# Allegro board Netduino3_16Dec16_0800.brd
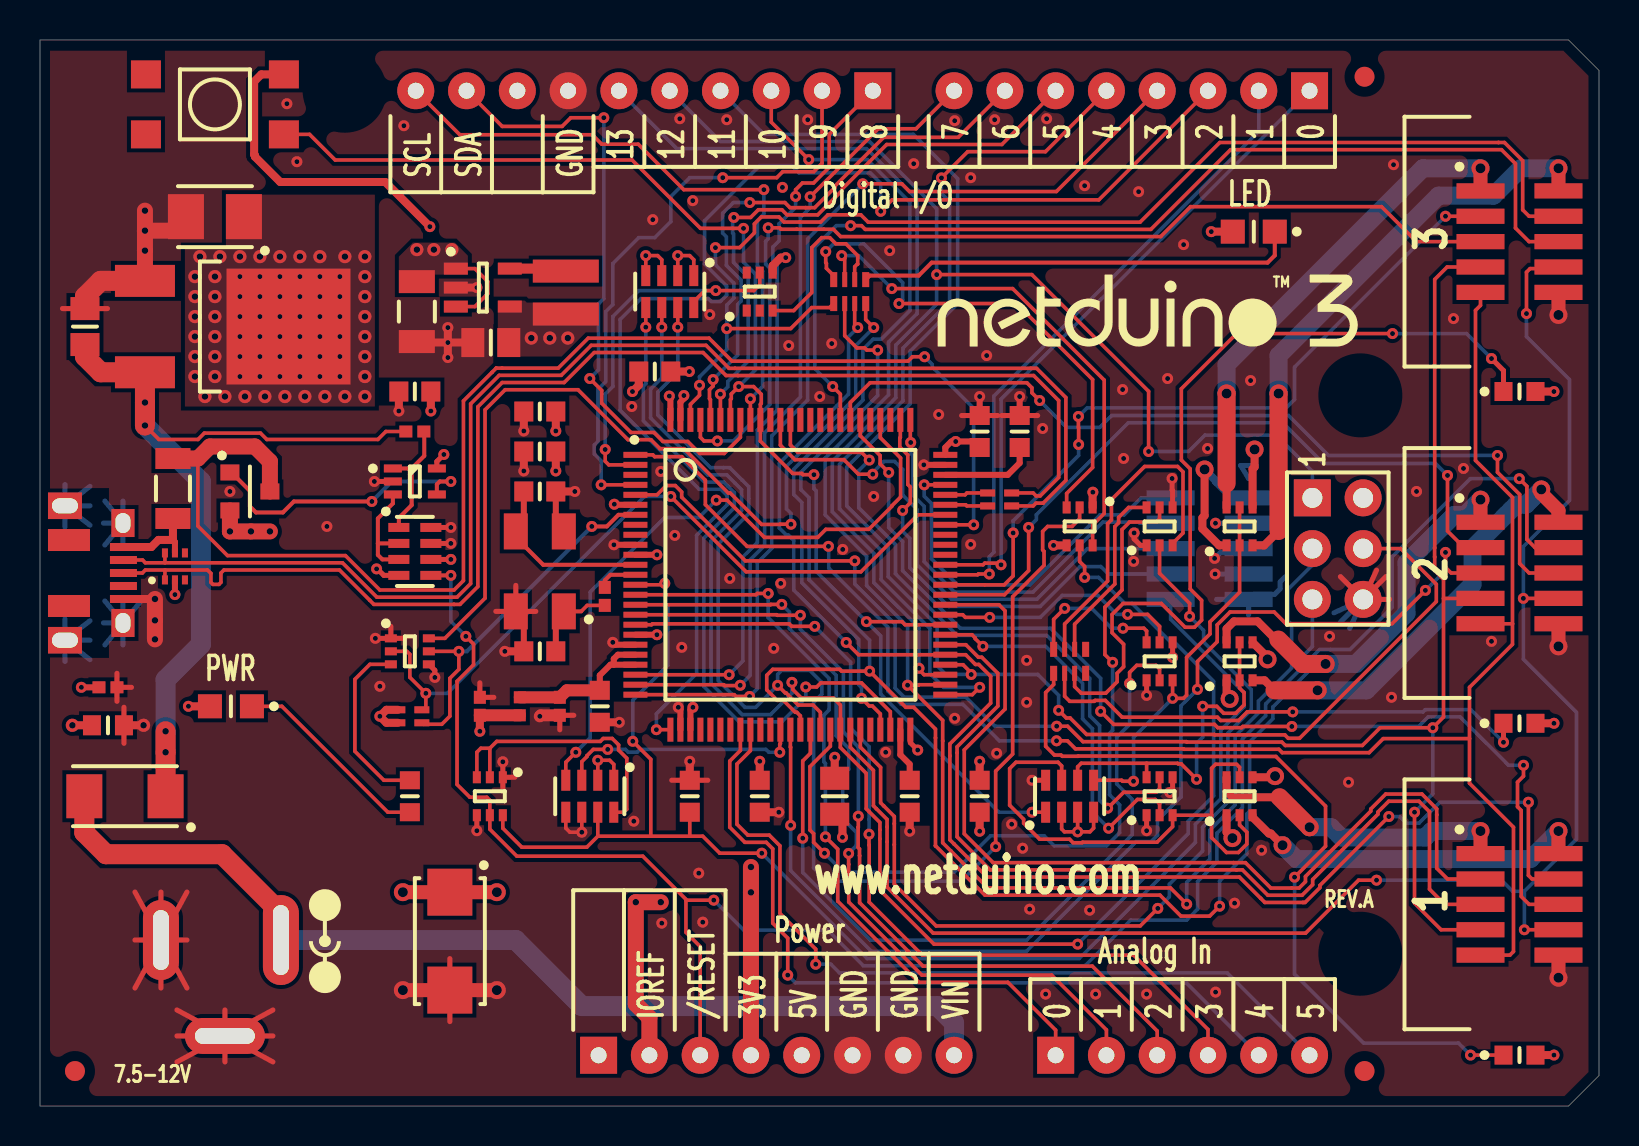
[diagram p0: board, top side]
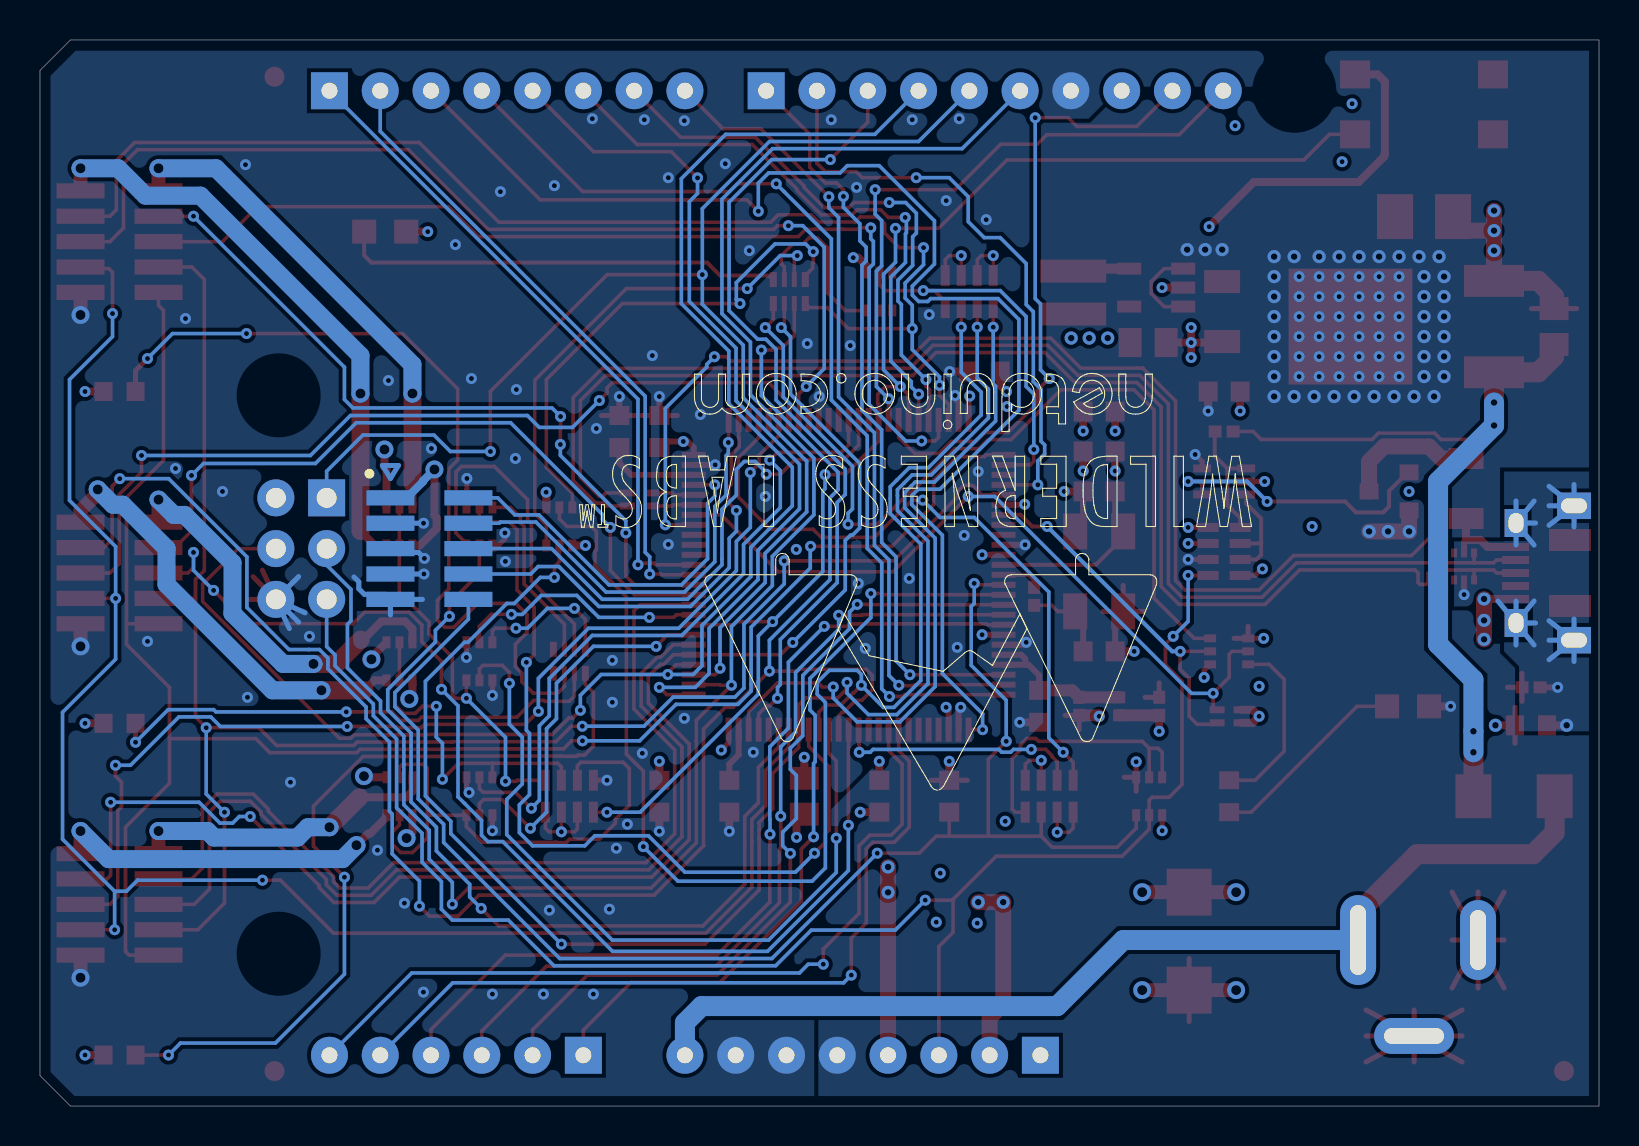
[diagram p1: board, bottom side, seen from below]

Outline 77.98 x 53.34 mm; copper layers: TOP, L2-GND, L3-PWR, BOTTOM. Coordinates in mm from the lower left corner of the outline.
Outline path: 0,0 0,53.34 76.45,53.34 77.98,51.82 77.98,1.52 76.45,0 0,0

## Placement (name value [footprint] x y rotation side)
C1  22uF  [CAPC3216X180N]  18.85 39.75 270 top
C2  10uF  [CAPC2012X125N]  2.25 39 90 top
C4  22uF  [CAPC2012X125N]  22.55 38.2 180 top
C5  0.1uF  [CAPC1608X90N]  28 20 270 top
C6  0.1uF  [CAPC1608X90N]  18.75 35.75 180 top
C10  0.1uF  [CAPC1608X90N]  25 32.75 180 top
C11  0.1uF  [CAPC1608X90N]  36 15.5 270 top
C12  0.1uF  [CAPC1608X90N]  47 15.5 270 top
C13  0.1uF  [CAPC1608X90N]  47 33.75 90 top
C14  0.1uF  [CAPC1608X90N]  30.75 36.75 0 top
C16  2.2uF  [CAPC1608X90N]  49 33.75 90 top
C17  2.2uF  [CAPC1608X90N]  43.5 15.5 270 top
C18  18pF  [CAPC1608X90N]  25 30.75 0 top
C19  18pF  [CAPC1608X90N]  25 22.75 180 top
C20  4.7nF  [CAPC1005X55N]  3.4 20.95 180 top
C21  100uF  [CAPMP6032X280N]  20.5 8.25 270 top
C42  22uF  [CAPC2012X125N]  39.75 15.5 270 top
C43  47uF  [F931A476MBA]  8.75 44.5 180 top
C44  1uF  [CAPC1005X55N]  26 20 270 top
C45  1uF  [CAPC1005X55N]  22 20 90 top
C46  0.1uF  [CAPC1608X90N]  25 34.75 180 top
C47  0.1uF  [CAPC1608X90N]  32.5 15.5 90 top
D1  WHITE  [LEDC2012X110N]  9.55 20 180 top
D2  BLUE  [LEDC2012X110N]  60.71 43.75 180 top
D3  SS15E-TP  [SS15-TP]  4.25 15.5 180 top
D4  -  [SP3003-04XTG]  6.75 27 90 top
D5  BLUE  [LEDC1608X80N]  74 2.55 0 top
D6  BLUE  [LEDC1608X80N]  74 19.15 0 top
D7  BLUE  [LEDC1608X80N]  74 35.75 0 top
F1  MF-NSMF075-2  [RESC3216X100N]  6.65 30.9 90 top
F2  -  [FID_1-00_X_2-00]  1.75 1.75 0 top
F3  -  [FID_1-00_X_2-00]  66.25 1.75 0 top
F4  -  [FID_1-00_X_2-00]  66.25 51.5 0 top
J1  ADC-043A-1  [ADC-002A-1]  -1.75 8.31 90 top
J2  HDR100IMP08F-G-V-TH-BLUE  [HDR100IMP08F-G-V-TH]  63.5 50.8 180 top
J3  HDR100IMP08F-G-V-TH-BLUE  [HDR100IMP10F-G-V-TH]  41.66 50.8 180 top
J4  HDR100IMP08F-G-V-TH-BLUE  [HDR100IMP06F-G-V-TH]  50.8 2.54 0 top
J5  -  [DX4R005JJ2R1800]  0 26.67 270 top
J6  HDR100IMP08F-G-V-TH-BLUE  [HDR100IMP08F-G-V-TH]  27.94 2.54 0 top
J7  -  [67996-206HLF]  63.64 30.43 270 top
J8  -  [MINI_JTAG_SMD]  58.5 27.89 180 bottom
J10  HDR050IDC10MS2-G-V-SM-BLUE  [20021521-00010T1LF]  74 10.09 0 top
J11  HDR050IDC10MS2-G-V-SM-BLUE  [20021521-00010T1LF]  74 26.67 0 top
J12  HDR050IDC10MS2-G-V-SM-BLUE  [20021521-00010T1LF]  74 43.25 0 top
L1  2.2uH  [LQH3NPN2R2NM0L]  26.3 40.7 270 top
L2  BEAD FERRITE/SM  [INDC1005X55N]  24 20 270 top
MT1  -  [MTG320H420NP_720KO]  15.24 50.8 0 top
MT2  -  [MTG320H420NP_720KO]  66.04 35.56 0 top
MT3  -  [MTG320H420NP_720KO]  66.04 7.62 0 top
NOREF  -  []  0 53.34 0 top
NOREF#2  -  []  44.9 38 0 top
NOREF#3  -  []  14.25 8.25 90 top
NOREF#4  -  []  0 0 90 top
Q1  -  [MUN5215DW1T1G]  18.5 22.75 0 top
Q2  -  [MUN5215DW1T1G]  22.5 15.5 270 top
Q3  -  [NTR4101PT1G]  10.5 30.75 0 top
Q4  -  [NTJD4152PT1G]  36 40.75 90 top
Q5  -  [NTJD4152PT1G]  60 15.5 90 top
Q6  -  [MUN5215DW1T1G]  56 15.5 90 top
Q7  -  [NTJD4152PT1G]  60 22.25 90 top
Q8  -  [NTJD4152PT1G]  52 29 270 top
Q9  -  [NTJD4152PT1G]  60 29 90 top
Q10  -  [MUN5215DW1T1G]  56 22.25 90 top
Q11  -  [MUN5215DW1T1G]  56 29 90 top
R1  1K  [RESCAV50P80X160X60-8N]  40.5 40.75 270 top
R3  1.5K  [RESC1608]  18.5 15.5 90 top
R4  10K  [RESCAV80P160X320X70-8N]  18.75 27.75 0 top
R5  10K  [RESCAV80P160X320X70-8N]  27.5 15.5 270 top
R6  15.4K  [CAPC1005X55N]  18.75 33.75 0 top
R7  390  [CAPC1005X55N]  28.25 25.5 90 top
R8  100K  [EXB24V]  18.5 19.5 0 top
R9  22  [EXB24V]  48 30.35 180 top
R10  1M  [RESC1608]  3.4 19.05 180 top
R12  10K  [RESCAV80P160X320X70-8N]  51.5 15.5 90 top
R14  10K  [RESCAV80P160X320X70-8N]  31.5 40.75 270 top
R15  680  [RESCAV50P80X160X60-8N]  51.5 22.25 90 top
SW1  -  [TSXH-2GL]  8.75 50.12 0 top
U1  LM3671MF-3.3/NOPB  [LM3671MF]  22.15 40.95 0 top
U2  -  [TLV1117-50IKVURG3]  5.25 39 0 top
U3  -  [LMV321IDCKR]  18.75 31.25 0 top
U4  STM32F427  [STM32F427VIT6]  37.53 26.58 0 top
Y1  25 Mhz  [ABM3B]  25 26.75 90 top

## Library data of the parts
C1 C2 C4-C6 C10-C14 C16-C21 C42-C47 = C
D1 = LED_2
D2 D5-D7 = LED_1
D3 = D05AZ75_0
D4 = HEADER 6_0
F1 = FUSE
F2-F4 MT1-MT3 = MOUNT_HOLE
J1 = HEADER 3
J2 J6 = HEADER 8
J3 = HEADER 10
J4 = HEADER 6
J5 = HEADER 11_0
J7 = HEADER 6_1
J8 J10-J12 = HEADER 10_2
L1 = L
L2 = BEAD FERRITE/SM
Q1 Q2 = MUN5215DW1T1G_3
Q3 = NDF0610/TO_1
Q4 Q5 Q7-Q9 = NTJD4152PT1G
Q6 Q10 Q11 = MUN5215DW1T1G_0
R1 R4 R5 R12 R14 R15 = RESCAV50P80X160X60-8N
R3 R6 R7 R10 = R
R8 R9 = EXB24V
SW1 = SW PUSHBUTTON-SPST-2_0
U1 = HEADER 5_0
U2 = LM7805/TO_2
U3 = LMV321/SO
U4 = STM32F427_0
Y1 = OSC_XF

## Footprints (pads in the part's own frame, mm; a bottom-side part is the same pattern mirrored in y, then rotated)
67996-206HLF
  rect 1.85x1.85 hole 1: 1(0,0)
  round 1.85 hole 1: 2(0,2.54) 3(2.54,0) 4(2.54,2.54) 5(5.08,0) 6(5.08,2.54)
20021521-00010T1LF
  rect 2.4x0.76 smd: 1(-1.95,2.54) 2(1.95,2.54) 3(-1.95,1.27) 4(1.95,1.27) 5(-1.95,0) 6(1.95,0) 7(-1.95,-1.27) 8(1.95,-1.27) 9(-1.95,-2.54) 10(1.95,-2.54)
ABM3B
  rect 1.8x1.2 smd: 1(-2,-1.2) 2(2,-1.2) 3(2,1.2) 4(-2,1.2)
ADC-002A-1
  oval 4.5x1.8 hole 3.5x0.8: 1(0,-13.8)
  oval 1.8x4 hole 0.8x3: 2(-4.8,-11)
  oval 4x1.8 hole 3x0.8: 3(0,-7.8)
CAPC1005X55N
  rect 0.65x0.6 smd: 1(-0.45,0) 2(0.45,0)
CAPC1608X90N
  rect 0.95x1 smd: 1(-0.8,0) 2(0.8,0)
CAPC2012X125N
  rect 1.15x1.45 smd: 1(-0.9,0) 2(0.9,0)
CAPC3216X180N
  rect 1.15x1.8 smd: 1(-1.5,0) 2(1.5,0)
CAPMP6032X280N
  rect 2.35x2.25 smd: 1(-2.45,0) 2(2.45,0)
DX4R005JJ2R1800
  rect 0.4x1.35 smd: 1(-1.3,4.175) 2(-0.65,4.175) 3(0,4.175) 4(0.65,4.175) 5(1.3,4.175)
  rect 1.4x1.15 hole 1x0.75: 6(-2.5,4.15) 7(2.5,4.15)
  rect 1.325x1.7 hole 0.75x1.3: 8(-3.362,1.25) 11(3.362,1.25)
  rect 1.1x2.1 smd: 9(-1.65,1.45) 10(1.65,1.45)
EXB24V
  rect 0.75x0.35 smd: 1(-0.6,0.325) 2(-0.6,-0.325) 3(0.6,-0.325) 4(0.6,0.325)
F931A476MBA
  rect 1.8x2.25 smd: 1(-1.45,0) 2(1.45,0)
FID_1-00_X_2-00
  round 1 smd: 1(0,0)
HDR100IMP06F-G-V-TH
  rect 1.85x1.85 hole 0.8: 1(0,0)
  round 1.85 hole 0.8: 2(2.54,0) 3(5.08,0) 4(7.62,0) 5(10.16,0) 6(12.7,0)
HDR100IMP08F-G-V-TH
  rect 1.85x1.85 hole 0.8: 1(0,0)
  round 1.85 hole 0.8: 2(2.54,0) 3(5.08,0) 4(7.62,0) 5(10.16,0) 6(12.7,0) 7(15.24,0) 8(17.78,0)
HDR100IMP10F-G-V-TH
  rect 1.85x1.85 hole 0.8: 1(0,0)
  round 1.85 hole 0.8: 2(2.54,0) 3(5.08,0) 4(7.62,0) 5(10.16,0) 6(12.7,0) 7(15.24,0) 8(17.78,0) 9(20.32,0) 10(22.86,0)
INDC1005X55N
  rect 0.6x0.6 smd: 1(-0.45,0) 2(0.45,0)
LEDC1608X80N
  rect 0.899x0.95 smd: A(0.8,0) C(-0.8,0)
LEDC2012X110N
  rect 1.2x1.2 smd: A(1.05,0) C(-1.05,0)
LM3671MF
  rect 1.2x0.6 smd: 1(-1.35,0.95) 2(-1.35,0) 3(-1.35,-0.95) 4(1.35,-0.95) 5(1.35,0.95)
LMV321IDCKR
  rect 0.9x0.4 smd: 1(-1.1,0.65) 2(-1.1,0) 3(-1.1,-0.65) 4(1.1,-0.65) 5(1.1,0.65)
LQH3NPN2R2NM0L
  rect 1.15x3.3 smd: 1(-1.075,0) 2(1.075,0)
MINI_JTAG_SMD
  rect 2.4x0.76 smd: 1(-1.95,2.54) 2(1.95,2.54) 3(-1.95,1.27) 4(1.95,1.27) 5(-1.95,0) 6(1.95,0) 7(-1.95,-1.27) 8(1.95,-1.27) 9(-1.95,-2.54) 10(1.95,-2.54)
MTG320H420NP_720KO
  round 0 hole 3.2 unplated: (0,0)
MUN5215DW1T1G
  rect 0.6x0.4 smd: 1(-0.95,0.65) 2(-0.95,0) 3(-0.95,-0.65) 4(0.95,-0.65) 5(0.95,0) 6(0.95,0.65)
NTJD4152PT1G
  rect 0.6x0.4 smd: 1(-0.95,0.65) 2(-0.95,0) 3(-0.95,-0.65) 4(0.95,-0.65) 5(0.95,0) 6(0.95,0.65)
NTR4101PT1G
  rect 0.95x0.8 smd: 1(-1,0.95) 2(-1,-0.95) 3(1,0)
RESC1608
  rect 0.899x1.001 smd: 1(-0.8,0) 2(0.8,0)
RESC3216X100N
  rect 1.05x1.75 smd: 1(-1.5,0) 2(1.5,0)
RESCAV50P80X160X60-8N
  rect 0.75x0.35 smd: 1(-0.6,0.8) 4(-0.6,-0.8) 5(0.6,-0.8) 8(0.6,0.8)
  rect 0.75x0.25 smd: 2(-0.6,0.25) 3(-0.6,-0.25) 6(0.6,-0.25) 7(0.6,0.25)
RESCAV80P160X320X70-8N
  rect 1.05x0.45 smd: 1(-0.8,1.2) 2(-0.8,0.4) 3(-0.8,-0.4) 4(-0.8,-1.2) 5(0.8,-1.2) 6(0.8,-0.4) 7(0.8,0.4) 8(0.8,1.2)
SP3003-04XTG
  rect 0.45x0.3 smd: 1(-0.675,0.5) 2(-0.675,0) 3(-0.675,-0.5) 4(0.675,-0.5) 5(0.675,0) 6(0.675,0.5)
SS15-TP
  rect 1.8x2.2 smd: A(2.032,0) C(-2.032,0)
STM32F427VIT6
  rect 1.2x0.3 smd: 1(-7.75,6) 2(-7.75,5.5) 3(-7.75,5) 4(-7.75,4.5) 5(-7.75,4) 6(-7.75,3.5) 7(-7.75,3) 8(-7.75,2.5) 9(-7.75,2) 10(-7.75,1.5) 11(-7.75,1) 12(-7.75,0.5) 13(-7.75,0) 14(-7.75,-0.5) 15(-7.75,-1) 16(-7.75,-1.5) 17(-7.75,-2) 18(-7.75,-2.5) 19(-7.75,-3) 20(-7.75,-3.5) 21(-7.75,-4) 22(-7.75,-4.5) 23(-7.75,-5) 24(-7.75,-5.5) 25(-7.75,-6) 51(7.75,-6) 52(7.75,-5.5) 53(7.75,-5) 54(7.75,-4.5) 55(7.75,-4) 56(7.75,-3.5) 57(7.75,-3) 58(7.75,-2.5) 59(7.75,-2) 60(7.75,-1.5) 61(7.75,-1) 62(7.75,-0.5) 63(7.75,0) 64(7.75,0.5) 65(7.75,1) 66(7.75,1.5) 67(7.75,2) 68(7.75,2.5) 69(7.75,3) 70(7.75,3.5) 71(7.75,4) 72(7.75,4.5) 73(7.75,5) 74(7.75,5.5) 75(7.75,6)
  rect 0.3x1.2 smd: 26(-6,-7.75) 27(-5.5,-7.75) 28(-5,-7.75) 29(-4.5,-7.75) 30(-4,-7.75) 31(-3.5,-7.75) 32(-3,-7.75) 33(-2.5,-7.75) 34(-2,-7.75) 35(-1.5,-7.75) 36(-1,-7.75) 37(-0.5,-7.75) 38(0,-7.75) 39(0.5,-7.75) 40(1,-7.75) 41(1.5,-7.75) 42(2,-7.75) 43(2.5,-7.75) 44(3,-7.75) 45(3.5,-7.75) 46(4,-7.75) 47(4.5,-7.75) 48(5,-7.75) 49(5.5,-7.75) 50(6,-7.75) 76(6,7.75) 77(5.5,7.75) 78(5,7.75) 79(4.5,7.75) 80(4,7.75) 81(3.5,7.75) 82(3,7.75) 83(2.5,7.75) 84(2,7.75) 85(1.5,7.75) 86(1,7.75) 87(0.5,7.75) 88(0,7.75) 89(-0.5,7.75) 90(-1,7.75) 91(-1.5,7.75) 92(-2,7.75) 93(-2.5,7.75) 94(-3,7.75) 95(-3.5,7.75) 96(-4,7.75) 97(-4.5,7.75) 98(-5,7.75) 99(-5.5,7.75) 100(-6,7.75)
TLV1117-50IKVURG3
  rect 3x1.6 smd: 1(0,2.286) 3(0,-2.286)
  rect 6.2x5.8 smd: 4(7.18,0)
TSXH-2GL
  rect 1.5x1.4 smd: 1(-3.45,1.5) 2(3.45,1.5) 3(-3.45,-1.5) 4(3.45,-1.5)

## Nets
3V3_GOPORT1: J10.1(3V3) Q5.6(DRAIN)
3V3_GOPORT2: J11.1(3V3) Q7.6(DRAIN)
3V3_GOPORT3: J12.1(3V3) Q9.6(DRAIN)
5V_GOPORT1: J10.2(5V) Q5.3(DRAIN)
5V_GOPORT2: J11.2(5V) Q7.3(DRAIN)
5V_GOPORT3: J12.2(5V) Q9.3(DRAIN)
+3.3V: C4.1 C10.1 C11.1 C12.1 C13.1 C14.1 C21.1 C42.1 C45.1 C46.1 J6.2 J6.4 J8.1(VCC) L1.2 L2.2 Q4.4(SOURCE) Q5.1(SOURCE) Q7.1(SOURCE) Q8.1(SOURCE) Q8.4(SOURCE) Q9.1(SOURCE) R4.4(1) R5.1 R5.2(1) R8.1 R8.2(1) R14.1 R14.2(1) R14.3(1) R14.4(1) SW1.2 U1.4(FB) U4.6(VBAT) U4.11(VDD1) U4.19(VDD2) U4.28(VDD3) U4.50(VDD4) U4.75(VDD5) U4.100(VDD6)
+5.0V: C1.1 C6.1 C43.1 D1.A(ANODE) D2.A(ANODE) D5.A(ANODE) D6.A(ANODE) D7.A(ANODE) J6.5 J7.2(VTG) Q3.2(SOURCE) Q5.4(SOURCE) Q7.4(SOURCE) Q9.4(SOURCE) R4.6(2) R12.2(1) R12.3(1) R12.4(1) U1.1(VIN) U1.3(EN) U2.4(VOUT) U3.5(+VCC)
+VIN: D3.A(1) J1.1 J6.8
+VIN_PROTECTED: C2.1 D3.C(2) R6.1 U2.3(VIN)
GND: C1.2 C2.2 C4.2 C5.2 C6.2 C10.2 C11.2 C12.2 C13.2 C14.2 C16.2 C17.2 C18.2 C19.2 C20.1 C21.2 C42.2 C43.2 C44.2 C45.2 C46.2 C47.2 J1.2 J1.3 J3.7 J5.5(GND) J6.6 J6.7 J7.6(GND) J8.3(GND1) J8.5(GND2) J8.7(GND3) J8.9(GND4) J10.10(GND) J11.10(GND) J12.10(GND) Q1.1(E) Q1.4(E) Q2.1(E) Q2.4(E) Q6.1(E) Q6.4(E) Q10.1(E) Q10.4(E) Q11.1(E) Q11.4(E) R4.7(2) R4.8(2) R5.5(2) R5.6(2) R10.1 R12.8(2) U1.2(GND) U2.1(GND) U3.2(-VCC) U4.10(VSS1) U4.20(VSSA) U4.27(VSS2) U4.74(VSS3) U4.99(VSS4) Y1.2 Y1.4
VIN_COMP_LOGIC: Q3.1(GATE) U3.4(OUT)
VIN_REF: R4.2(1) R4.3(1) U3.3(-VIN)
/ENABLE_UART_TX_PULLUP_GOPORT1: Q4.5(GATE) R14.8(2) U4.2(PE3)
/ENABLE_UART_TX_PULLUP_GOPORT2: Q8.2(GATE) R14.7(2) U4.41(PE10)
/ENABLE_UART_TX_PULLUP_GOPORT3: Q8.5(GATE) R14.6(2) U4.43(PE12)
/EXTERNAL_RESET: J6.3 J7.5(R\E\S\E\T\) Q2.5(B) R4.5(2)
/INT_GOPORT1: J10.3(GIPO) U4.60(PD13)
/INT_GOPORT2: J11.3(GIPO) U4.61(PD14)
/INT_GOPORT3: J12.3(GIPO) U4.62(PD15)
/PWR_CTRL_GOPORT1: Q5.2(GATE) Q5.5(GATE) Q6.3(C) R12.7(2)
/PWR_CTRL_GOPORT2: Q6.6(C) Q7.2(GATE) Q7.5(GATE) R12.6(2)
/PWR_CTRL_GOPORT3: Q9.2(GATE) Q9.5(GATE) Q10.3(C) R12.5(2)
/RESET_MCU: C47.1 J8.10(NRST) Q2.6(C) R5.7(2) U4.14(NRST)
/SPI_CS_GOPORT1: J10.6(SPI_CS) U4.81(PD0)
/SPI_CS_GOPORT2: J11.6(SPI_CS) U4.82(PD1)
/SPI_CS_GOPORT3: J12.6(SPI_CS) U4.83(PD2)
A0: J4.1 U4.15(PC0)
A1: J4.2 U4.16(PC1)
A2: J4.3 U4.17(PC2)
A3: J4.4 U4.18(PC3)
A4: J4.5 U4.33(PC4)
A5: J4.6 U4.34(PC5)
CHASSIS_USB: C20.2 D4.2(GND) J5.6(CHS1) J5.7(CHS2) J5.8(CHS3) J5.11(CHS4) R10.2
D0: J2.1 U4.64(PC7)
D1: J2.2 U4.63(PC6)
D2: J2.3 U4.26(PA3)
D3: J2.4 U4.25(PA2)
D4: J2.5 U4.51(PB12)
D5: J2.6 U4.95(PB8)
D6: J2.7 U4.96(PB9)
D7: J2.8 U4.24(PA1)
D8: J3.1 U4.23(PA0)
D9: J3.2 U4.4(PE5)
D10: J3.3 U4.47(PB10)
D11: J3.4 J7.4(MOSI) U4.54(PB15)
D12: J3.5 J7.1(MISO) U4.53(PB14)
D13: J3.6 J7.3(SCK) U4.52(PB13)
JTCK: J8.4(JTCK) U4.76(PA14)
JTDI: J8.8(JTDI) U4.77(PA15)
JTDO: J8.6(JTDO) U4.89(PB3)
JTMS: J8.2(JTMS) U4.72(PA13)
LED: Q1.2(B) R8.4(2) U4.69(PA10)
LED_GOPORT1: Q10.2(B) U4.40(PE9)
LED_GOPORT2: Q11.5(B) U4.42(PE11)
LED_GOPORT3: Q11.2(B) U4.45(PE14)
OSC_IN: C18.1 U4.12(PH0) Y1.3
OSC_OUT: R7.2 U4.13(PH1)
OTG_FS_DM: R9.4(2) U4.70(PA11)
OTG_FS_DP: R9.3(2) U4.71(PA12)
PWR_LED: Q1.5(B) R8.3(2) U4.7(PC13)
PWR_ON_GOPORT1: Q6.5(B) U4.88(PD7)
PWR_ON_GOPORT2: Q6.2(B) U4.57(PD10)
PWR_ON_GOPORT3: Q10.5(B) U4.59(PD12)
SCL: J3.10 U4.92(PB6)
SDA: J3.9 U4.93(PB7)
SPI3_MISO: R5.4(1) U4.79(PC11)
SPI4_MISO: J10.8(SPI_MISO) J11.8(SPI_MISO) J12.8(SPI_MISO) U4.44(PE13)
SPI4_MOSI: J10.7(SPI_MOSI) J11.7(SPI_MOSI) J12.7(SPI_MOSI) U4.5(PE6)
SPI4_SCK: J10.9(SPI_SCK) J11.9(SPI_SCK) J12.9(SPI_SCK) U4.1(PE2)
SWITCH1: R12.1 SW1.4 U4.58(PD11) U4.91(PB5) U4.94(BOOT0)
USART3_RX_GOPORT1: J10.5(USART_RX) U4.56(PD9)
USART3_TX_GOPORT1: J10.4(USART_TX) R1.7(2) U4.55(PD8)
USART7_RX_GOPORT2: J11.5(USART_RX) U4.38(PE7)
USART7_TX_GOPORT2: J11.4(USART_TX) R1.6(2) U4.39(PE8)
USART8_RX_GOPORT3: J12.5(USART_RX) U4.97(PE0)
USART8_TX_GOPORT3: J12.4(USART_TX) R1.5(2) U4.98(PE1)
USB5V: D4.5(VCC) F1.1 J5.1(VBUS)
USB5V_F: F1.2 Q3.3(DRAIN) U4.68(PA9)
USB_D+: D4.1(I/O1) J5.3(D+) R9.2(1)
USB_D-: D4.6(I/O4) J5.2(D-) R9.1
VCAP_1: C17.1 U4.49(VCAP_1)
VCAP_2: C16.1 U4.73(VCAP_2)
N62667: R4.1 R6.2 U3.1(+VIN)
N62753: Q2.2(B) Q2.3(C) R5.8(2)
N62779: L1.1 U1.5(SW)
N62801: D2.C(CATHODE) R1.1
N62841: R5.3(1) U4.37(PB2)
N63081: C5.1 C44.1 L2.1 U4.21(VREF+) U4.22(VDDA)
N74908: Q1.6(C) R1.8(2)
N77511: D1.C(CATHODE) R3.1
N77515: Q1.3(C) R3.2
N197515: Q10.6(C) R15.8(2)
N197535: D5.C(CATHODE) R15.1
N197921: Q11.3(C) R15.7(2)
N197949: D6.C(CATHODE) R15.2(1)
N198166: Q11.6(C) R15.6(2)
N198194: D7.C(CATHODE) R15.3(1)
N199051: Q4.3(DRAIN) R1.2(1)
N202411: Q8.6(DRAIN) R1.3(1)
N203046: Q8.3(DRAIN) R1.4(1)
N249435: R14.5(2) U4.48(PB11)
N261857: C19.1 R7.1 Y1.1

Pads without a net: D4 3 4; F2 1; F3 1; F4 1; J3 8; J5 4 9 10; J6 1; Q4 1 2 6; R15 4 5; SW1 1 3; U4 3 8 9 29 30 31 32 35 36 46 65 66 67 78 80 84 85 86 87 90

## Via types
v1: diameter 0.55, hole 0.25, TOP to BOTTOM, 333 vias
v2: diameter 0.9, hole 0.5, TOP to BOTTOM, 25 vias
v3: diameter 0.66, hole 0.33, TOP to BOTTOM, 61 vias

## Routing (per net, layer and track width the routed paths; a pad name or vN(x,y) marks a point on that pad's centre or on a via; arc(x,y) is an arc through that point)
3V3_GOPORT1: length 15.6
  TOP w0.4: Q5.6 59.35,15.75 59.65,15.45 62,15.45
  TOP w0.7: J10.1 v2(72.05,13.76)
  TOP w0.9: 62,15.45 v2(63.5,13.95)
  BOTTOM w0.9: v2(63.5,13.95) 64.58,13.95 65.09,13.44 69.27,13.44 69.6,13.76 v2(72.05,13.76)
3V3_GOPORT2: length 20.4
  TOP w0.4: Q7.6 59.35,23.88 59.72,24.25 60.9,24.25 61.81,23.34 61.94,23.34
  TOP w0.7: J11.1 v2(72.05,30.34)
  TOP w0.9: v2(64.3,22.12) 63.16,22.12 61.94,23.34
  BOTTOM w0.9: v2(72.05,30.34) 71.29,29.58 70.74,29.58 68.35,27.18 68.35,24.65 65.82,22.12 v2(64.3,22.12)
3V3_GOPORT3: length 25
  TOP w0.4: 59.35,31.15 Q9.6
  TOP w0.7: J12.1 v2(72.05,46.92)
  TOP w0.9: v2(59.35,35.65) 59.35,31.15
  BOTTOM w0.9: v2(72.05,46.92) 69.17,46.92 59.35,37.1 v2(59.35,35.65)
5V_GOPORT1: length 18
  TOP w0.4: Q5.3 60.65,14.45 61.46,13.64 61.56,13.64 v2(62.15,13.05)
  TOP w0.7: J10.2 v2(75.95,13.76)
  BOTTOM w0.9: v2(62.15,13.05) 62.84,12.36 74.55,12.36 v2(75.95,13.76)
5V_GOPORT2: length 21.9
  TOP w0.4: 61.75,20.8 61.25,21.3 Q7.3
  TOP w0.7: v2(75.09,30.85) 75.09,30.66 75.95,29.8 J11.2
  TOP w0.9: 61.75,20.8 v2(63.9,20.8)
  BOTTOM w0.9: v2(63.9,20.8) 66.35,20.8 71.65,26.1 71.65,27.9 73.84,30.09 74.33,30.09 v2(75.09,30.85)
5V_GOPORT3: length 29.4
  TOP w0.4: 61.95,28.77 61.23,28.05 Q9.3
  TOP w0.7: J12.2 v2(75.95,46.92)
  TOP w0.9: v2(61.95,35.65) 61.95,28.77
  BOTTOM w0.9: v2(75.95,46.92) 74.07,46.92 72.7,45.55 69.95,45.55 61.95,37.55 v2(61.95,35.65)
+3.3V: length 80.4
  TOP w0.18: R14.1 32.7,42.34 32.49,42.55 v1(31.9,42.55) R14.2 ; R14.3 31.1,42.34 30.89,42.55 v1(30.3,42.55) R14.4 ; R5.1 28.7,17.09 28.5,17.3 v1(27.9,17.3) R5.2
  TOP w0.25: v1(43.9,17.81) 43.53,18.18 U4.50 ; v1(16.84,26.88) 16.87,26.88 17.2,26.55 R4.4
  TOP w0.3: U4.75 45.28,32.95 45.58,33.25 v1(45.8,33.25) 46.7,33.25 C13.1 ; U4.28 32.53,19.82 v1(32.66,19.95) ; U4.100 31.53,35.47 v1(31.48,35.52) ; U4.19 v1(30.86,23.58) ; U4.11 v1(30.86,27.58) ; v1(28.73,30.11) 28.76,30.08 U4.6
  TOP w0.4: v1(37.3,42.45) 37.05,42.45 36.65,42.05 Q4.4 ; v2(58.25,31.85) 58.25,29.54 58.14,29.43 58.14,28.89 58.98,28.05 Q9.1 ; R8.2 17.32,19.18 v1(17,19.5) 17.32,19.82 R8.1 ; Q8.4 v1(50.7,28.05) ; SW1.2 11.07,51.62 10.71,51.26 10.71,47.61 10.75,47.57 10.75,47.5 12.02,46.23 17.27,46.23 v1(19.5,44) ; v2(59.5,20.37) 59.35,20.52 Q7.1 ; C11.1 v1(36,17.25) ; v1(29.64,35.75) 29.95,36.06 C14.1 ; v1(52.66,30.71) 52.65,30.7 Q8.1 ; C10.1 v1(25.8,31.77) ; v2(59.64,13.41) 59.35,13.7 Q5.1 ; C45.1 v1(22,18.75) ; C42.1 v1(39.75,17.45) ; C12.1 v1(47,17.25) ; C46.1 v1(25.8,33.77)
  TOP w0.6: L2.2 C45.1
  TOP w0.7: v2(18.15,10.7) C21.1 v2(22.85,10.7)
  TOP w0.8: J6.2 30.48,4.42 29.8,5.1 v3(29.8,10.2) v3(31.05,10.2) ; J6.4 v3(35.56,10.69) v3(35.56,11.96)
  BOTTOM w0.4: v2(58.25,31.85) 58.82,31.28 58.82,31.24 59.63,30.43 J8.1
  vias: v3(24.57,38.42) v3(25.5,38.42) v3(26.4,38.42)
+5.0V: length 33.8
  TOP w0.18: U1.1 21.75,41.9 22.4,41.25 22.4,40.65 21.75,40 U1.3 ; R12.3 v1(51.9,13.72) ; v1(51.9,13.72) 51.24,13.72 51.1,13.86 R12.2 ; v1(51.9,13.72) 52.52,13.72 52.7,13.9 R12.4
  TOP w0.25: v1(20.2,32.6) 19.85,32.25 U3.5 ; R4.6 v1(20.55,27.35)
  TOP w0.4: D5.A v1(75.72,2.55) ; v2(61.4,22.35) 61.4,22.45 Q7.4 ; Q5.4 61.72,16.45 v2(61.77,16.51) ; C6.1 v1(19.55,34.77) ; v2(60.75,32.85) 60.75,31.97 60.65,31.87 Q9.4 ; D7.A v1(75.72,35.75) ; D1.A v1(7.42,20) ; D6.A v1(75.72,19.15) ; D2.A v1(58.59,43.75)
  TOP w0.8: v3(11.5,28.75) v3(10.55,28.75) v3(9.5,28.75) Q3.2
  L3-PWR w0.254: J7.2 66.18,31.75 ; J7.2 67.5,30.43 ; J7.2 65.04,29.29 ; J7.2 65.04,31.57 ; J7.2 67.32,29.29 ; J7.2 67.32,31.57
  vias: v1(10,41.5) v1(10,40.5) v1(10,39.5) v1(10,38.5) v1(10,37.5) v1(10,36.5) v1(11,41.5) v1(11,40.5) v1(11,39.5) v1(11,38.5) v1(11,37.5) v1(11,36.5) v1(12,41.5) v1(12,40.5) v1(12,39.5) v1(12,38.5) v1(12,37.5) v1(12,36.5) v1(13,41.5) v1(13,40.5) v1(13,39.5) v1(13,38.5) v1(13,37.5) v1(13,36.5) v1(14,41.5) v1(14,40.5) v1(14,39.5) v1(14,38.5) v1(14,37.5) v1(14,36.5) v1(15,41.5) v1(15,40.5) v1(15,39.5) v1(15,38.5) v1(15,37.5) v1(15,36.5) v3(7.75,41.5) v3(7.75,40.5) v3(7.75,39.5) v3(7.75,38.5) v3(7.75,37.5) v3(7.75,36.5) v3(8,42.5) v3(8.25,35.5) v3(8.75,41.5) v3(8.75,40.5) v3(8.75,39.5) v3(8.75,38.5) v3(8.75,37.5) v3(8.75,36.5) v3(9,42.5) v3(9.25,35.5) v3(10,42.5) v3(10.25,35.5) v3(11,42.5) v3(11.25,35.5) v3(12,42.5) v3(12.25,35.5) v3(13,42.5) v3(13.25,35.5) v3(14,42.5) v3(14.25,35.5) v3(15.25,42.5) v3(15.25,35.5) v3(16.25,42.5) v3(16.25,41.5) v3(16.25,40.5) v3(16.25,39.5) v3(16.25,38.5) v3(16.25,37.5) v3(16.25,36.5) v3(16.25,35.5) v3(18.85,42.85) v3(19.7,42.85) v3(20.6,42.85)
+VIN: length 51.7
  TOP w1: D3.A 2.22,13.68 3.3,12.6 9.11,12.6 12.05,9.66 J1.1
  BOTTOM w1: J6.8 45.72,4.17 44.88,5 27.1,5 23.79,8.31 J1.1
+VIN_PROTECTED: length 43
  TOP w0.18: R6.1 17.3,33.75 16.9,33.35 11.35,33.35 11.03,33.67 8.22,33.67 7.9,33.35 5.95,33.35 v3(5.25,34.05)
  TOP w1: D3.C v3(6.28,17.7) v3(6.28,18.75) ; v3(5.25,34.05) v3(5.25,35.2) U2.3 3.04,36.71 2.25,37.5 C2.1
  BOTTOM w1: v3(6.28,17.7) v3(6.28,18.75) 6.28,21.33 8.05,23.1 8.05,31.25 v3(5.25,34.05) v3(5.25,35.2)
GND: length 196.2
  TOP w0.18: R5.6 v1(27.1,13.7) 26.5,13.7 26.3,13.9 R5.5
  TOP w0.25: Q10.4 v1(56.65,22.45) ; R12.8 v1(49.62,16.3) ; R4.8 v1(20.55,28.95) ; Q11.1 55.05,28.05 54.73,28.38 v1(54.73,28.68) ; Q6.4 56.65,15.82 v1(56.52,15.69) ; Q10.1 v1(55.35,20.55) ; Q6.1 v1(55.35,13.78) ; Q11.4 56.65,30.79 56.62,30.82 v1(56.62,31.4) ; Q2.1 v1(23.15,17.23) ; Q1.1 v1(16.77,23.4) ; Q1.4 19.75,21.8 v1(19.75,21.45) ; U3.2 v1(16.73,31.25) ; R4.7 v1(20.55,28.15) ; Q2.4 v1(21.85,13.78)
  TOP w0.254: 22.8,24.75 Y1.4 ; Y1.4 24.8,24.75 ; Y1.4 23.8,26.05 ; 18.25,23.4 Q1.1 17.55,24 ; 26.7,19.55 C44.2 26,18.83 ; 4.75,5.91 J1.3 ; J1.3 6.05,10.71 ; J1.3 7.35,8.31 ; J1.3 7.35,10.71 ; J1.3 6.05,5.91 ; J1.3 7.35,5.91 ; J1.3 4.75,10.71 ; J1.3 4.75,8.31 ; 23.75,16.45 Q2.1 23.15,15.75 ; 3.85,20.25 C20.1 ; C20.1 3.85,21.65 ; C20.1 4.57,20.95 ; 20.5,7.37 C21.2 20.5,4.23 ; 4.2,18.15 R10.1 4.2,19.95 ; 6.85,3.51 J1.2 ; J1.2 11.65,3.51 ; J1.2 11.65,2.21 ; J1.2 6.85,4.81 ; J1.2 11.65,4.81 ; J1.2 9.25,2.21 ; J1.2 9.25,4.81 ; J1.2 6.85,2.21 ; J7.6 67.32,26.49 ; J7.6 67.5,25.35 ; J7.6 65.04,26.49 ; J7.6 66.85,26.81 ; 49.9,34.55 C16.2 48.1,34.55 ; 22,21.17 C45.2 22.7,20.45 ; 47.9,34.55 C13.2 46.1,34.55 ; 3.37,39.9 C2.2 1.13,39.9 ; 31.6,16.3 C47.2 33.4,16.3
  TOP w0.3: U4.99 32.03,35.22 32.21,35.4 v1(32.21,35.55) ; C13.2 v1(47,35.5) ; U4.74 v1(44.21,32.08) ; Y1.4 24.2,24.35 C19.2 ; Y1.2 25.8,29.15 C18.2 ; v1(28.65,23.2) 28.77,23.08 U4.20 ; U4.27 32.03,19.84 v1(31.93,19.95) ; U4.10 v1(28.71,28.08) ; C16.2 v1(49,35.5)
  TOP w0.4: C11.2 v1(36.95,14.7) ; R10.1 v3(5.18,19.05) ; C4.2 v1(20.4,38.2) ; v1(20.4,38.2) v1(20.4,38.95) ; v1(20.4,38.2) v1(20.4,37.45) ; v1(20.4,38.2) 18.9,38.2 C1.2 ; C47.2 v1(32.5,17.25) ; v1(40.14,13.45) 40.14,14.21 C42.2 ; C6.2 v1(17.95,34.77) ; U1.2 v1(21.86,40.95) ; C5.2 v1(28.98,19.2) ; C19.2 v1(23.25,22.75) ; C46.2 v1(24.2,33.77) ; C17.2 v1(43.5,13.75) ; C10.2 v1(24.2,31.77) ; C14.2 v1(32.48,36.75) ; J5.5 v3(5.75,25.37) ; C18.2 v1(26.75,30.75) ; C12.2 v1(47,13.75)
  TOP w0.6: C44.2 25.05,19.55 v1(25,19.5)
  TOP w0.7: v2(18.15,5.8) C21.2 v2(22.85,5.8) ; J10.10 v2(75.95,6.42) ; J12.10 v2(75.95,39.58) ; J11.10 v2(75.95,23)
  TOP w0.8: v3(5.75,25.37) v3(5.75,24.3) v3(5.75,23.35) ; C43.2 6.6,43.8 v3(5.25,43.8) ; U2.1 v3(5.25,42.8) v3(5.25,43.8) ; v3(5.25,43.8) v3(5.25,44.8)
  TOP w1: U2.1 3.04,41.29 2.25,40.5 C2.2
  L2-GND w0.254: J7.6 67.32,24.21 ; J7.6 65.04,26.49 ; J7.6 65.04,24.21 ; J7.6 67.5,25.35 ; J7.6 66.18,24.03 ; J7.6 67.32,26.49 ; 4.75,5.91 J1.3 ; J1.3 4.75,10.71 ; J1.3 7.35,10.71 ; J1.3 7.35,5.91 ; J1.3 4.75,8.31 ; J1.3 6.05,10.71 ; J1.3 6.05,5.91 ; J1.3 7.35,8.31 ; J1.2 11.65,2.21 ; J1.2 11.65,3.51 ; J1.2 9.25,2.21 ; J1.2 11.65,4.81 ; J1.2 6.85,3.51 ; J1.2 6.85,4.81 ; J1.2 6.85,2.21 ; J1.2 9.25,4.81
  BOTTOM w0.25: J8.3 v1(58.8,29.16) ; J8.9 60.7,25.6 61.75,25.6 62.03,25.88 62.03,26.23 62.28,26.47 ; J8.5 60.26,27.7 59.05,27.7 v1(58.75,27.4) ; J8.7 v1(58.77,26.62)
  BOTTOM w0.254: 64.72,24.68 J7.6 ; J7.6 65.04,24.21 ; J7.6 65.51,23.89 ; J7.6 65.04,26.49 ; 60.45,24.57 J8.9 58.85,25.35
  vias: v1(9.5,30.75) v1(12.35,50.15) v1(12.85,47.25) v1(14.35,29) v1(17,21) v1(18.2,49.05) v1(29.6,35) v1(29.7,14.25) v1(30.65,44.35) v1(31.05,31.75) v1(31.1,9.15) v1(31.75,28.55) v1(32,49.4) v1(32.1,22.95) v1(32.65,45.3) v1(32.95,11.65) v1(33.15,9.2) v1(33.5,39.6) v1(34.35,49.35) v1(34.5,26.4) v1(36.7,22.9) v1(37.05,26.15) v1(37.14,45.96) v1(37.45,38.05) v1(38.4,49.35) v1(39,35.5) v1(39.6,38.15) v1(40.15,27.85) v1(41.7,30.5) v1(42.3,17.7) v1(42.5,42.8) v1(43.7,47.15) v1(44.95,34.6) v1(45.75,49.3) v1(45.75,19.4) v1(46.55,46.45) v1(46.55,28.1) v1(47.35,37.55) v1(47.75,49.35) v1(47.85,17.65) v1(48.6,14.1) v1(49.15,12.9) v1(49.35,22.3) v1(49.35,20.2) v1(49.5,9.85) v1(50.15,33.9) v1(50.3,5.6) v1(50.35,49.4) v1(52.25,46.05) v1(52.5,9.8) v1(52.8,5.6) v1(54.15,35.85) v1(54.2,32.4) v1(54.7,27.25) v1(54.95,45.75) v1(55.35,5.6) v1(56.4,36.4) v1(57.2,43.1) v1(58.4,32.9) v1(58.8,5.7) v1(59.75,10.15) v1(60.55,36.3) v1(61.1,12.8) v1(64.5,23.5) v1(65.45,16.2) v1(67.6,20.45) v1(67.7,47.1) v1(68.85,30.75) v1(70.7,39.4) v1(71.2,31.9) v1(72.6,23.25)
VIN_COMP_LOGIC: length 14.2
  TOP w0.2: v1(16.6,30.25) 12.7,30.25 12.15,29.7 10.8,29.7 10.5,30 10.5,30.77 9.57,31.7 Q3.1 ; U3.4 19.85,31.11 20,31.25 v1(20.55,31.25)
  BOTTOM w0.2: v1(20.55,31.25) 17.6,31.25 v1(16.6,30.25)
VIN_REF: length 5.5
  TOP w0.2: 16.9,28.15 16.9,27.57 17.12,27.35 R4.3 ; 16.9,28.15 R4.2 ; 16.9,28.15 16.9,29.4 17.65,30.15 U3.3
/ENABLE_UART_TX_PULLUP_GOPORT1: length 19.2
  TOP w0.18: U4.2 28.45,32.08 28.27,32.26 v1(28.27,32.85) ; R14.8 32.7,40.25 33.25,40.8 v1(33.8,40.8) 35.7,40.8 36,41.1 Q4.5
  BOTTOM w0.18: v1(28.27,32.85) 28.27,35.62 28.66,36.01 28.66,39.51 29.95,40.8 v1(33.8,40.8)
/ENABLE_UART_TX_PULLUP_GOPORT2: length 71.8
  TOP w0.18: v1(36.9,21.05) 37.28,20.66 37.32,20.66 37.93,20.06 38.67,20.06 39.03,19.7 U4.41 ; v1(31.9,38.97) R14.7 ; Q8.2 52,29.38 51.62,29 50.4,29 50.15,28.75 50.15,27.82 50.22,27.75 50.22,27.05 48.65,25.48 48.65,17.61 47.8,16.76 v1(47.8,12.98)
  BOTTOM w0.18: v1(47.8,12.98) 46.07,11.25 39.36,11.25 38.7,11.91 38.7,20.2 39.1,20.6 39.1,21.2 38.5,21.8 37.1,21.8 36.9,21.59 v1(36.9,21.05) 35.79,19.95 35.27,19.95 33.92,21.29 33.92,28.11 35.24,29.43 35.45,29.64 35.45,30.39 35.45,30.99 35.13,31.31 34.5,31.94 34.2,31.94 33.54,31.94 30.9,34.58 30.9,35.72 31.9,36.72 v1(31.9,38.97)
/ENABLE_UART_TX_PULLUP_GOPORT3: length 78.2
  TOP w0.18: Q8.5 52,27.25 52.25,27 v1(52.25,26.45) ; R14.6 v1(31.1,38.97) ; v1(51.9,8.1) 44.72,8.1 42.01,10.8 42.01,13.37 42.01,14.19 41.48,14.72 41.48,14.73 41.33,14.88 41.33,16.64 40.03,17.94 U4.43 40.03,20.07 39.68,20.42 38.08,20.42 37.66,20.84 37.66,21.15 v1(37.61,21.2)
  BOTTOM w0.18: v1(31.1,38.97) 31.1,36.43 30.54,35.87 30.54,34.43 33.39,31.58 34.35,31.58 34.77,31.16 35.09,30.84 35.09,30.54 35.09,29.79 33.56,28.26 33.56,21.14 35.12,19.59 36.54,19.59 37.61,20.65 v1(37.61,21.2) ; v1(52.25,26.45) 52.95,26.45 54.26,25.14 54.63,25.14 56.57,23.2 56.75,23.2 58.7,21.25 58.7,15.52 57.43,14.25 57.43,13.63 v1(51.9,8.1)
/EXTERNAL_RESET: length 81
  TOP w0.18: J6.3 33.02,7.98 32.31,8.69 32.31,10.3 ; v1(33.7,10.3) 32.31,10.3 ; 32.31,10.3 32.31,10.34 30.15,12.5 23.85,12.5 22.5,13.85 Q2.5 22.5,15.3 22.35,15.45 21.5,15.45 20.86,16.09 20.86,21.25 21.69,22.08 21.69,23.11 v1(21.3,23.5)
  TOP w0.2: R4.5 v1(20.55,26.55)
  BOTTOM w0.18: J7.5 63.64,22.99 63.22,22.57 63.22,22.03 61.3,20.11 61.3,19.53 60.14,18.36 60.14,14.92 58.87,13.65 58.87,12.2 57.9,11.23 57.9,9.85 57.35,9.3 54.55,9.3 52.27,7.02 41.18,7.02 39.4,8.8 35.2,8.8 v1(33.7,10.3) ; v1(21.3,23.5) 20.55,24.25 v1(20.55,26.55)
/INT_GOPORT1: length 47.7
  TOP w0.18: U4.60 47.97,25.08 48.27,24.78 48.27,19.86 46.23,17.82 46.23,13.62 47.67,12.18 59.7,12.18 60.29,12.18 61.56,10.9 62.6,10.9 62.61,10.91 62.98,10.91 63.3,11.22 63.3,11.49 66.56,14.75 66.56,14.86 67.31,15.61 69.12,15.61 69.86,14.87 69.86,14.57 69.86,11.9 70.4,11.36 J10.3
/INT_GOPORT2: length 36
  TOP w0.18: J11.3 71.23,27.94 70.4,28.77 v1(70.4,31.55) ; v1(49.45,28.95) 49.45,26.79 48.24,25.58 U4.61
  BOTTOM w0.18: v1(70.4,31.55) 69.8,32.15 64.2,32.15 62.16,34.19 54.44,34.19 49.84,29.59 49.84,29.34 v1(49.45,28.95)
/INT_GOPORT3: length 38.1
  TOP w0.18: v1(48.67,28.67) 48.67,26.52 48.23,26.07 47.26,26.07 47.25,26.08 U4.62 ; J12.3 v1(70.3,44.52) ; v1(51.95,33.1) 51.95,33.95 51.94,33.95 v1(51.94,34.5)
  BOTTOM w0.18: v1(51.94,34.5) 52.37,34.93 62.33,34.93 62.75,35.35 62.75,36.97 v1(70.3,44.52) ; v1(48.67,28.67) 48.67,29.28 51.95,32.55 v1(51.95,33.1)
/PWR_CTRL_GOPORT1: length 26.6
  TOP w0.18: 58.6,14.55 58.6,16.9 58.8,17.1 59.85,17.1 60,16.95 Q5.5 ; 58.6,14.55 Q6.3 56.65,13.98 55.87,13.2 52.15,13.2 52.13,13.18 51.67,13.18 51.5,13.35 50,13.35 49.2,14.15 49.2,14.35 48.5,15.05 48.5,16.89 48.81,17.2 50.92,17.2 51.1,17.02 R12.7 ; 58.6,14.55 58.6,13.43 59.34,12.69 59.94,12.69 60.36,13.11 60.36,13.7 60,14.07 Q5.2
/PWR_CTRL_GOPORT2: length 17.1
  TOP w0.18: 55.35,17.15 56.9,17.15 56.93,17.12 57.08,17.12 v1(57.85,16.35) ; 55.35,17.15 52.08,17.15 51.9,16.97 R12.6 ; 55.35,17.15 Q6.6 ; v1(58.16,20) 58.86,20 59.21,19.65 59.8,19.65 60.22,20.07 60.22,20.68 60,20.91 Q7.2 Q7.5
  BOTTOM w0.18: v1(58.16,20) 58.16,18.45 57.85,18.15 v1(57.85,16.35)
/PWR_CTRL_GOPORT3: length 19.1
  TOP w0.18: R12.5 54.1,16.3 54.15,16.25 v1(54.7,16.25) ; Q10.3 v1(56.65,20.4) 57.2,20.4 57.35,20.55 57.35,22.45 58.52,23.62 58.52,24.22 60,25.7 Q9.2 Q9.5
  BOTTOM w0.18: v1(56.65,20.4) 54.7,18.45 v1(54.7,16.25)
/RESET_MCU: length 73.3
  TOP w0.18: 30.55,13.5 27.9,13.5 ; 30.55,13.5 32.5,13.5 ; 30.55,13.5 30.55,17.35 v1(29.65,18.25) ; 27.9,13.5 R5.7 ; 27.9,13.5 27.35,12.95 24.1,12.95 23.15,13.9 Q2.6 ; v1(31.25,26.15) 31.18,26.08 U4.14 ; v1(36.1,12.65) 34,12.65 33.15,13.5 32.5,13.5 ; 32.5,13.5 C47.1
  BOTTOM w0.18: v1(31.25,26.15) 31.25,25.15 31.4,25 31.4,22.05 29.65,20.3 v1(29.65,18.25) ; J8.10 56.55,24.36 60.22,20.68 60.22,19.97 59.06,18.81 59.06,15.37 57.79,14.1 57.79,13.19 51.98,7.38 41.37,7.38 v1(36.1,12.65)
/SPI_CS_GOPORT1: length 53.7
  TOP w0.18: v1(53.05,19.75) 53.7,19.09 58.74,19.09 58.91,18.93 60.1,18.93 60.16,18.99 v1(62.61,18.99) ; v1(42.45,31.7) 42.02,32.13 42.02,32.55 41.03,33.54 U4.81 ; v1(74.2,17.05) 74.2,16.5 73.9,16.21 73.9,14.97 74.09,14.79 74.09,10.48 74.48,10.09 J10.6
  BOTTOM w0.18: v1(53.05,19.75) 53.05,21.4 50.55,23.91 46.03,23.91 43.15,26.78 43.15,28.25 42.45,28.95 v1(42.45,31.7) ; v1(62.61,18.99) 68.96,18.99 69.44,19.47 71.03,19.47 73.45,17.05 v1(74.2,17.05)
/SPI_CS_GOPORT2: length 43.8
  TOP w0.18: v1(72.9,32.55) 72.9,31.71 74.01,30.6 74.01,27.14 74.48,26.67 J11.6 ; U4.82 40.53,35.2 41.52,36.19 49.36,36.19 49.61,35.94 49.61,35.69 v1(50,35.3)
  BOTTOM w0.18: v1(50,35.3) 51.34,33.95 53.01,33.95 53.6,34.55 62.45,34.55 64.45,32.55 v1(72.9,32.55)
/SPI_CS_GOPORT3: length 52.3
  TOP w0.18: J12.6 74.48,43.25 73.8,43.93 73.8,47.15 73.1,47.85 59.55,47.85 55.56,43.86 41.28,43.86 41.09,44.05 v1(40.55,44.05) ; U4.83 40.03,35.62 v1(39.65,36)
  BOTTOM w0.18: v1(39.65,36) 38.76,36.9 38.76,42.98 39.83,44.05 v1(40.55,44.05)
A0: length 38.5
  TOP w0.18: U4.15 35.81,25.58 35.88,25.64 v1(36.42,25.64) ; v1(39.29,13.47) 39.9,12.85 39.9,10.25 43.96,6.19 48.41,6.19 50.8,3.8 J4.1
  BOTTOM w0.18: v1(39.29,13.47) 39.29,17.14 39.2,17.22 39.2,19.55 39.46,19.81 39.46,21.4 36.42,24.44 v1(36.42,25.64)
A1: length 41
  TOP w0.18: v1(40.45,12.64) 40.45,12.09 40.45,12.09 40.45,10.21 44.11,6.55 50.6,6.55 53.34,3.81 J4.2 ; v1(37.1,25.1) 36.55,25.1 36.54,25.08 U4.16
  BOTTOM w0.18: v1(40.45,12.64) 40.83,13.02 40.83,13.7 40.15,14.38 40.15,16.55 40.45,16.85 40.45,17.9 39.82,18.53 39.82,21.54 37.49,23.88 37.49,24.71 v1(37.1,25.1)
A2: length 42.6
  TOP w0.18: J4.3 55.88,3.75 52.63,7 44.17,7 40.99,10.17 40.99,12.53 40.99,12.53 40.99,12.86 40.92,12.93 40.92,13.95 40.93,13.96 v1(40.93,14.5) ; v1(38.03,24.55) 36.87,24.55 36.85,24.58 U4.17
  BOTTOM w0.18: v1(38.03,24.55) 38.03,23.85 40.18,21.69 40.18,18.72 40.93,17.97 v1(40.93,14.5)
A3: length 44.8
  TOP w0.18: v1(38.75,24) 37.6,24 37.47,24.13 30.63,24.13 30.59,24.08 U4.18 ; v1(41.47,13.6) 41.47,13.05 41.48,13.05 41.48,10.2 44.13,7.55 54.7,7.55 58.42,3.83 J4.4
  BOTTOM w0.18: v1(41.47,13.6) 41.47,14.34 41.48,14.35 41.48,17.98 40.54,18.91 40.54,22.21 v1(38.75,24)
A4: length 39.6
  TOP w0.18: v1(37.4,6.55) 37.4,8.4 36.65,9.15 36.65,12.87 36.33,13.2 35.26,13.2 34.5,13.95 34.5,17.26 35.03,17.79 U4.33
  BOTTOM w0.18: J4.5 57.34,6.16 37.79,6.16 v1(37.4,6.55)
A5: length 40.9
  TOP w0.18: v1(38.8,7.09) 38.8,7.85 37.01,9.64 37.01,13.02 36.48,13.55 35.4,13.55 34.86,14.1 34.86,17.11 35.53,17.78 U4.34
  BOTTOM w0.18: v1(38.8,7.09) 39.55,7.09 39.99,6.66 59.38,6.66 J4.6
CHASSIS_USB: length 29.1
  TOP w0.3: v1(6.75,25.59) 6.75,25.65 D4.2 ; C20.2 v1(2.07,20.95)
  TOP w0.4: R10.2 v3(1.62,19.05)
  BOTTOM w0.254: 1.25,28.97 J5.8 ; J5.8 2.5,29.06 ; J5.8 2.5,30.03 ; J5.8 1.25,31.09 ; J5.8 2.5,31.01 ; 3.18,24.17 J5.7 ; J5.7 4.15,23.07 ; J5.7 3.25,23.07 ; J5.7 3.25,25.27 ; J5.7 5.05,25.27 ; J5.7 4.15,25.27 ; J5.11 2.5,23.31 ; J5.11 2.5,24.28 ; J5.11 1.25,22.25 ; J5.11 2.5,22.33 ; J5.11 1.25,24.37 ; 3.18,29.17 J5.6 ; J5.6 3.25,28.07 ; J5.6 4.15,30.27 ; J5.6 3.25,30.27 ; J5.6 4.15,28.07
D0: length 33
  TOP w0.18: v1(48.07,27.08) 47.98,27.16 47.26,27.16 47.17,27.08 U4.64
  BOTTOM w0.18: v1(48.07,27.08) 48.07,35.37 J2.1
D1: length 32
  TOP w0.18: v1(47.48,26.62) 46.94,26.62 46.9,26.58 U4.63
  BOTTOM w0.18: v1(47.48,26.62) 47.48,27.48 47.71,27.71 47.71,35.52 60.96,48.77 J2.2
D2: length 66.3
  TOP w0.18: v1(42.05,44.77) 42.62,45.34 52.96,45.34 J2.3 ; U4.26 v1(30.83,18.83)
  BOTTOM w0.18: v1(42.05,44.77) 42.05,46.17 41.53,46.69 37.96,46.69 37.6,47.05 36,47.05 33.24,44.29 33.24,42.13 34.34,41.03 34.34,40.57 34.03,40.26 33.57,40.26 33.43,40.4 30.06,40.4 29.02,39.36 29.02,34.81 32.97,30.86 34.05,30.86 34.37,30.54 34.37,30.09 32.84,28.56 32.84,21.64 30.83,19.62 v1(30.83,18.83)
D3: length 50.7
  TOP w0.18: v1(41.15,46.14) 43.11,46.14 43.49,45.76 50.84,45.76 J2.4 ; U4.25 34.72,20.58 34.81,20.49 v1(35.49,20.49)
  BOTTOM w0.18: v1(35.49,20.49) 35.88,20.88 35.88,27.18 36.6,27.9 36.6,33.53 38.4,35.33 38.4,43.39 40.76,45.76 40.77,45.76 v1(41.15,46.14)
D4: length 43.8
  TOP w0.18: U4.51 46.63,20.58 v1(47,20.95) ; v1(45.09,46.44) 46.4,47.75 50.29,47.75 J2.5
  BOTTOM w0.18: v1(47,20.95) 45.2,20.95 44.51,21.64 44.51,23.9 42.07,26.34 42.07,27.8 39.99,29.88 39.99,32.11 43.16,35.29 43.16,37.92 45.5,40.26 45.5,45.25 45.09,45.66 v1(45.09,46.44)
D5: length 30
  TOP w0.18: U4.95 v1(34.03,35.62) ; J2.6 48.11,48.11 42.35,48.11 40.12,45.88 40.12,45.81 38.9,44.59 38.15,44.59 37.36,44.59 37.11,44.85 35.93,44.85 35.54,44.46 v1(34.7,44.46)
  BOTTOM w0.18: v1(34.7,44.46) 34.64,44.4 34.64,43.69 34.69,43.64 34.69,42.21 35.42,41.47 35.42,37.27 34.4,36.25 34.4,35.99 v1(34.03,35.62)
D6: length 28.3
  TOP w0.18: v1(33.67,36.35) 33.67,36.02 33.49,35.84 33.49,35.39 33.53,35.35 U4.96 ; v1(35.5,45.21) 37.26,45.21 37.51,44.95 38.3,44.95 38.75,44.95 39.76,45.96 39.76,46.03 42.2,48.47 45.93,48.47 J2.7
  BOTTOM w0.18: v1(33.67,36.35) 34.9,37.58 34.9,40.11 35.06,40.28 35.06,41.32 34.33,42.06 34.33,43.49 34.15,43.68 34.15,44.67 34.68,45.21 v1(35.5,45.21)
D7: length 40.6
  TOP w0.18: v1(38.52,45.49) 41.93,48.9 43.82,48.9 J2.8 ; v1(35.02,21.05) 35.04,21.05 35.04,21.04 34.24,21.04 34.2,21.08 U4.24
  BOTTOM w0.18: v1(38.52,45.49) 38.52,44.95 38.03,44.46 38.03,35.48 36.24,33.68 36.24,28.05 35.52,27.33 35.52,21.54 v1(35.02,21.05)
D8: length 37.4
  TOP w0.18: v1(37.79,45.51) 37.79,45.84 38.13,46.19 38.69,46.19 39.48,46.97 39.48,48.62 J3.1 ; U4.23 v1(34.47,21.58)
  BOTTOM w0.18: v1(37.79,45.51) 37.79,44.97 36.97,44.14 36.97,43.29 36.66,42.98 36.66,42.28 36.86,42.07 36.86,34.81 35.88,33.83 35.88,28.2 35.16,27.48 35.16,22.27 v1(34.47,21.58)
D9: length 30.2
  TOP w0.18: v1(34.15,46.45) 36.85,46.45 37.15,46.75 38.7,46.75 39.12,47.17 J3.2 ; U4.4 v1(28.07,31.08)
  BOTTOM w0.18: v1(28.07,31.08) 28.07,32.28 27.73,32.62 27.73,33.08 27.91,33.26 27.91,35.86 28.3,36.25 28.3,39.75 28.65,40.1 28.65,42.15 29.95,43.45 30.75,43.45 31.55,44.25 31.55,45.5 32.5,46.45 v1(34.15,46.45)
D10: length 41.1
  TOP w0.18: v1(41.09,20.4) 41.48,20.01 41.64,20.01 42.03,19.62 U4.47 ; J3.3 36.58,49.23 v1(38.45,47.35)
  BOTTOM w0.18: v1(38.45,47.35) 41.38,47.35 43.51,45.22 43.51,39.8 42.08,38.37 41.67,38.37 41.16,37.86 41.16,35.32 37.7,31.86 37.7,30.6 38.11,30.19 38.11,26.19 40.95,23.34 40.95,21.08 41.09,20.95 v1(41.09,20.4)
D11: length 78.8
  TOP w0.18: v1(46.58,21.59) 46.58,21.67 46.17,22.08 U4.54 ; J7.4 68.06,27.89 69.84,26.11 69.84,25.24 63,18.4 62.43,18.4 62.26,18.57 58.76,18.57 58.74,18.59 52.35,18.59 51.53,19.41 51.34,19.41 v1(50.95,19.8)
  BOTTOM w0.18: J3.4 36.22,48.62 43.68,48.62 45.9,46.4 45.9,40.15 43.52,37.77 43.52,35.14 40.35,31.96 40.35,30.03 42.43,27.95 42.43,26.49 44.87,24.04 44.87,22.03 45.31,21.59 v1(46.58,21.59) 49.91,21.59 50.95,20.55 v1(50.95,19.8)
D12: length 70.9
  TOP w0.18: v1(55.45,32.75) 55.45,35.76 49.61,41.6 v1(44.85,41.6) ; v1(43.96,21.9) 43.96,21.84 44.22,21.58 U4.53
  BOTTOM w0.18: v1(55.45,32.75) 57.45,32.75 58.27,33.57 61.83,33.57 63.64,31.76 J7.1 ; v1(43.96,21.9) 43.96,23.93 41.71,26.19 41.71,27.65 39.63,29.73 39.63,32.26 42.8,35.44 42.8,38.07 44.85,40.12 v1(44.85,41.6) 44.85,44.9 41.49,48.26 34.04,48.26 J3.5
D13: length 89.6
  TOP w0.18: U4.52 43.96,21.08 43.94,21.06 v1(43.39,21.06) 45.15,19.3 45.15,18.27 45.15,13.17 45.57,12.75 47.41,10.91 56.54,10.91 v1(57.35,10.1)
  BOTTOM w0.18: v1(43.39,21.06) 43.39,23.99 41.35,26.04 41.35,27.5 39.27,29.58 39.27,32.41 42.44,35.59 42.44,38.22 43.87,39.65 43.87,45.37 41.34,47.9 31.86,47.9 J3.6 ; v1(57.35,10.1) 57.35,11.2 58.51,12.35 58.51,13.8 59.78,15.07 59.78,18.51 60.94,19.68 60.94,20.26 62.6,21.92 62.6,24.1 62.42,24.27 62.42,25.85 63.64,27.07 J7.3
JTCK: length 21.8
  TOP w0.18: v1(43.55,33.2) 43.53,33.22 U4.76
  BOTTOM w0.18: v1(43.55,33.2) 43.55,32.66 43.66,32.54 43.66,30.57 44.23,30 44.23,27.23 45.74,25.71 49.67,25.71 53.17,29.22 54.95,29.22 55.01,29.16 J8.4
JTDI: length 22.8
  TOP w0.18: v1(43.15,29.8) 43.53,30.19 43.53,30.97 43.41,31.1 43.41,32.57 43.01,32.97 43.01,33.43 43.03,33.45 U4.77
  BOTTOM w0.18: J8.8 53.43,26.62 53.06,27 52.02,27 50.02,25 45.45,25 43.51,26.93 43.51,28.4 43.15,28.76 v1(43.15,29.8)
JTDO: length 28
  TOP w0.18: v1(41.65,31.61) 40.94,31.61 40.21,32.34 37.76,32.34 37.03,33.07 U4.89
  BOTTOM w0.18: J8.6 52.39,27.89 49.85,25.36 45.59,25.36 43.87,27.08 43.87,27.38 43.87,29.85 43.15,30.57 43.15,31.85 42.75,32.25 42.21,32.25 41.65,31.69 v1(41.65,31.61)
JTMS: length 19.2
  TOP w0.18: U4.72 v1(44.23,31.08)
  BOTTOM w0.18: J8.2 55.08,30.43 54.23,29.58 53.02,29.58 49.52,26.07 45.89,26.07 44.59,27.38 44.59,30.15 44.23,30.51 v1(44.23,31.08)
LED: length 37.1
  TOP w0.18: U4.69 43.91,29.58 41.06,26.73 35.32,26.73 v1(31.55,30.5) ; R8.4 19.23,19.82 19.3,19.9 v1(19.3,20.65) 18.5,21.45 18.5,22.6 18.35,22.75 Q1.2
  BOTTOM w0.18: v1(31.55,30.5) 30.23,30.5 20.38,20.65 v1(19.3,20.65)
LED_GOPORT1: length 38.4
  TOP w0.18: v1(38.15,13.4) 38.15,17.27 38.53,17.65 U4.40 ; Q10.2 56,21.87 55.82,22.05 54.85,22.05 54.5,21.7 v1(54.5,21.15)
  BOTTOM w0.18: v1(38.15,13.4) 38.15,11.69 41.54,8.3 49.35,8.3 54.63,13.58 54.63,15.34 53.85,16.12 53.85,18.45 54.5,19.1 v1(54.5,21.15)
LED_GOPORT2: length 41.9
  TOP w0.18: v1(53.65,22.2) 53.26,22.59 53.26,24.96 54.12,25.82 54.12,28.84 54.5,29.22 55.84,29.22 56,29.38 Q11.5 ; U4.42 39.53,18 38.51,16.98 38.51,13.81 38.7,13.63 38.7,13.2 v1(39.24,12.65)
  BOTTOM w0.18: v1(39.24,12.65) 40.19,11.7 45.72,11.7 47.55,13.52 50.23,13.52 50.73,13.02 53.34,13.02 54,13.68 54,15.07 53.49,15.58 53.49,18.64 53.65,18.8 v1(53.65,22.2)
LED_GOPORT3: length 44.8
  TOP w0.18: v1(57.5,24.5) 57.5,25.15 56,26.65 Q11.2 ; v1(55.91,9.89) 55.03,9.01 44.82,9.01 42.73,11.1 42.73,13.08 42.73,14.49 42.2,15.02 42.05,15.17 42.05,16.94 41.03,17.96 U4.45
  BOTTOM w0.18: v1(57.5,24.5) 58.2,23.8 58.2,23.22 60.58,20.83 60.58,19.83 59.42,18.66 59.42,15.22 58.15,13.95 58.15,12.76 56.49,11.1 56.49,10.46 v1(55.91,9.89)
OSC_IN: length 9
  TOP w0.2: Y1.3 23.8,28.45 25.17,27.08 U4.12
  TOP w0.3: Y1.3 24.2,29.15 C18.1
OSC_OUT: length 2
  TOP w0.2: U4.13 28.53,26.58 28.25,26.3 R7.2
OTG_FS_DM: length 2.1
  TOP w0.18: U4.70 46.3,30.08 46.36,30.02 47.4,30.02
OTG_FS_DP: length 2.2
  TOP w0.18: U4.71 46.27,30.58 46.36,30.68 R9.3
PWR_LED: length 18.2
  TOP w0.18: Q1.5 v1(20.95,22.75) 20.95,21.85 20.5,21.4 20.5,19.5 20.09,19.1 19.18,19.1 R8.3
  TOP w0.2: U4.7 28.93,29.58 28.35,29 v1(27.6,29)
  BOTTOM w0.2: v1(20.95,22.75) 21.35,22.75 v1(27.6,29)
PWR_ON_GOPORT1: length 34.5
  TOP w0.18: Q6.5 56,15.88 55.82,15.7 54.2,15.7 v1(53.4,14.9) ; v1(41.48,32.32) 41.09,32.71 37.9,32.71 37.53,33.08 U4.88
  BOTTOM w0.18: v1(53.4,14.9) 53,15.3 53,19.03 52.51,19.52 52.51,21.39 50.35,23.55 45.88,23.55 42.79,26.64 42.79,28.1 40.95,29.94 40.95,31.79 v1(41.48,32.32)
PWR_ON_GOPORT2: length 19.5
  TOP w0.18: U4.57 46.62,23.58 46.78,23.42 46.78,23.39 v1(47.16,23) ; Q6.2 56,15.12 55.78,15.34 54.89,15.34 v1(53.45,13.9)
  BOTTOM w0.18: v1(47.16,23) 50.3,23 52.15,21.15 52.15,19.38 52.64,18.88 52.64,14.71 v1(53.45,13.9)
PWR_ON_GOPORT3: length 12.7
  TOP w0.18: v1(47.5,24.45) 46.28,24.45 46.15,24.58 U4.59 ; Q10.5 56,24 55.4,24.6 v1(54.4,24.6)
  BOTTOM w0.18: v1(47.5,24.45) 50.03,24.45 51.13,25.55 52.91,25.55 53.85,24.6 v1(54.4,24.6)
SCL: length 31.5
  TOP w0.18: U4.92 v1(35.53,35.39) ; v1(36.2,45.85) 32.2,45.85 29.92,48.13 28.09,48.13 27.62,48.6 21,48.6 J3.10
  BOTTOM w0.18: v1(35.53,35.39) 36.14,36 36.14,41.77 35.88,42.04 35.88,44.3 36.2,44.63 v1(36.2,45.85)
SDA: length 31.8
  TOP w0.18: v1(28.2,49.45) 26.55,49.45 26.11,49.01 23.12,49.01 J3.9 ; U4.93 35.03,33.46 34.22,32.65 33,32.65 32.4,33.25 31.16,33.25 30.71,33.7 29.56,33.7 28.09,35.16 28.09,35.8 v1(27.5,36.4)
  BOTTOM w0.18: v1(28.2,49.45) 28.2,40.4 27.94,40.14 27.94,36.84 v1(27.5,36.4)
SPI3_MISO: length 33.3
  TOP w0.18: U4.79 42.03,33.44 43.05,32.42 43.05,30.47 42.6,30.03 42.6,30 41.46,28.86 39.31,28.86 38.9,28.45 36.24,28.45 34.37,30.32 v1(33.83,30.32) ; v1(26.8,17.7) 26.3,17.2 R5.4
  BOTTOM w0.18: v1(33.83,30.32) 32.96,29.45 31.25,29.45 27.52,25.72 27.52,18.42 v1(26.8,17.7)
SPI4_MISO: length 84.9
  TOP w0.18: v1(74.25,8.82) J10.8 ; J12.8 75.87,41.9 74.53,41.9 74.35,41.72 v1(74.35,39.65) ; U4.44 40.53,17.95 41.69,16.79 41.69,15.02 41.84,14.88 41.84,14.87 42.37,14.34 42.37,13.98 42.37,10.95 44.67,8.65 63.3,8.65 65.95,11.3 v1(66.85,11.3) ; v1(74.19,25.4) J11.8
  BOTTOM w0.18: 74.25,10.74 73.66,10.74 73.1,11.3 v1(66.85,11.3) ; 74.25,10.74 v1(74.25,8.82) ; 74.25,10.74 76.85,13.35 76.85,19.7 74.19,22.36 v1(74.19,25.4) 74.19,28 76.5,30.3 76.5,36.35 74.35,38.5 v1(74.35,39.65)
SPI4_MOSI: length 88.8
  TOP w0.18: 70.2,25.4 70.2,19.46 v1(69.67,18.93) 67.03,18.93 66.14,18.04 62.28,18.04 62.12,18.21 57.37,18.21 57.35,18.23 52.17,18.23 51.4,19 v1(50.85,19) ; 70.2,25.4 J11.7 ; 70.2,25.4 70.2,26.35 69.76,26.79 69.76,27.47 69.75,27.47 69.75,27.93 69.76,27.93 69.76,41.36 70.38,41.98 J12.7 ; J10.7 70.08,8.82 68.75,10.15 v1(68.75,14.7) ; U4.5 30.86,30.58 31.32,31.05 31.78,31.05 32.09,30.73 32.09,30.46 35.28,27.28 v1(40.75,27.28)
  BOTTOM w0.18: v1(40.75,27.28) 40.75,26.73 40.75,26.73 40.75,26.12 42.77,24.11 42.77,20.91 43.22,20.46 46.31,20.46 47.77,19 v1(50.85,19) ; v1(69.67,18.93) 69.67,15.62 v1(68.75,14.7)
SPI4_SCK: length 90.4
  TOP w0.18: v1(50.84,18.27) 51.39,18.27 51.79,17.87 57.2,17.87 57.22,17.85 61.97,17.85 62.14,17.68 66.48,17.68 67.18,18.38 71.5,18.38 ; 73.65,24.13 73.65,30.45 71.8,32.3 71.8,39.81 72.05,40.06 J12.9 ; 73.65,24.13 73.65,23.1 71.5,20.95 71.5,18.38 ; 73.65,24.13 J11.9 ; 71.5,18.38 71.5,16.15 73.7,13.95 73.7,7.73 73.52,7.55 J10.9 ; U4.1 30.65,32.58 30.74,32.49 32.1,32.49 33.28,31.31 33.28,30.09 35.37,28 38.89,28 38.89,28 v1(39.44,28)
  BOTTOM w0.18: v1(39.44,28) 39.45,28 39.45,26.92 42.41,23.96 42.41,21.1 42.41,20.76 43.07,20.1 46.16,20.1 47.99,18.27 v1(50.84,18.27)
SWITCH1: length 69.4
  TOP w0.18: v1(35.19,43.91) 35.19,43.91 35.19,43.91 34.64,43.91 33.03,43.92 29.61,47.34 14.77,47.34 13.48,48.62 SW1.4 ; v1(41.34,24.24) 43.11,24.24 43.27,24.08 U4.58 ; v1(38.71,31.59) 38.16,31.59 38.1,31.65 37.65,31.65 36.03,33.27 U4.91 36.03,35.11 36.08,35.16 36.08,35.61 35.69,36 v1(34.95,36) 34.58,35.63 34.58,35.39 34.53,35.35 U4.94 ; R12.1 v1(49.62,14.7)
  BOTTOM w0.18: v1(34.95,36) 35.78,36.83 35.78,41.62 35.19,42.22 v1(35.19,43.91) ; v1(38.71,31.59) 38.71,30.89 38.83,30.77 38.83,26.75 v1(41.34,24.24) 42.05,23.52 42.05,21.25 42.05,20.61 47.96,14.7 v1(49.62,14.7)
USART3_RX_GOPORT1: length 46.2
  TOP w0.18: U4.56 46.31,23.08 46.94,22.45 47.1,22.45 47.91,21.65 47.91,20.01 45.87,17.97 45.87,17.67 45.87,13.47 47.52,11.82 59.84,11.82 60.14,11.82 61.41,10.54 62.75,10.54 62.75,10.55 63.13,10.55 63.66,11.08 63.66,11.34 66.92,14.6 66.92,14.71 67.46,15.25 68.97,15.25 69.5,14.72 69.5,10.85 70.26,10.09 J10.5
USART3_TX_GOPORT1: length 74.9
  TOP w0.18: J10.4 74.63,11.36 74.45,11.54 v1(74.45,15.2) ; v1(40.9,38.95) 40.75,39.1 R1.7 ; v1(67.47,14.48) 64.02,11.04 64.02,10.93 63.27,10.19 63.17,10.19 63.17,10.19 61.26,10.19 61.05,10.4 59.99,11.46 47.38,11.46 45.72,13.11 45.51,13.32 45.51,17.52 45.51,18.12 47.55,20.16 47.55,21.5 46.95,22.09 46.79,22.09 46.3,22.58 U4.55 40.94,22.58 v1(40.33,23.2)
  BOTTOM w0.18: v1(40.33,23.2) 37.7,25.82 37.7,28.3 37.43,28.57 37.33,28.57 36.98,28.92 36.98,32.16 39.86,35.04 40.44,35.62 40.44,38.49 v1(40.9,38.95) ; v1(74.45,15.2) 70.02,15.2 68.98,14.15 68.34,14.15 68.01,14.48 v1(67.47,14.48)
USART7_RX_GOPORT2: length 57.8
  TOP w0.18: v1(70.3,27.7) 70.3,26.95 70.58,26.67 J11.5 ; v1(57.9,20.85) 57.9,22.25 58.88,23.23 58.88,24.07 59.53,24.72 61.73,24.72 62.31,24.14 67.63,24.14 v1(69.3,25.8) ; U4.38 37.53,17.96 37.55,17.95 v1(37.55,14.04)
  BOTTOM w0.18: v1(69.3,25.8) 70.3,26.8 v1(70.3,27.7) ; v1(57.9,20.85) 57.07,20.02 57.07,15.47 57.06,15.46 56.74,15.14 55.9,14.29 55.9,13.55 55.58,13.23 54.83,13.23 49.34,7.74 41.59,7.74 37.55,11.78 v1(37.55,14.04)
USART7_TX_GOPORT2: length 92.7
  TOP w0.18: v1(73.99,31.39) 74.37,31.01 74.37,28.35 74.78,27.94 J11.4 ; v1(41.9,37.82) 41.35,37.82 41.25,37.93 40.86,37.93 40.25,38.54 R1.6 ; v1(59,10) 58.5,9.5 57.07,9.5 56.02,10.55 47.56,10.55 47.56,10.55 47.26,10.55 45.42,12.39 44.79,13.02 44.79,18.86 43.7,19.95 43.31,19.95 v1(41.49,21.76) 40.09,21.76 40,21.85 36.65,21.85 36.35,21.55 36.35,20.82 36.87,20.3 37.18,20.3 37.78,19.7 37.85,19.7 38.03,19.52 U4.39
  BOTTOM w0.18: v1(41.49,21.76) 41.49,23.31 38.47,26.34 38.47,30.43 38.06,30.84 38.06,31.71 41.9,35.55 41.9,37.28 v1(41.9,37.82) ; v1(59,10) 59,11.26 60.36,12.62 60.36,14.61 60.5,14.75 60.5,18.21 61.66,19.38 61.66,19.96 63.58,21.88 63.58,22.42 64,22.84 64.54,22.84 65.52,22.84 67.63,24.95 67.63,27.48 71.54,31.39 v1(73.99,31.39)
USART8_RX_GOPORT3: length 51.3
  TOP w0.18: U4.97 33.03,33.46 33.21,33.28 v1(33.88,33.28) ; J12.5 68.85,43.25 67.1,45 57.55,45 56.05,43.5 40.05,43.5 39.68,43.87 39.2,43.87 37.85,43.87 37.85,43.87 37.07,43.87 37,43.94 v1(36.42,43.94)
  BOTTOM w0.18: v1(33.88,33.28) 34.68,33.28 36.5,35.1 36.5,41.92 36.3,42.13 36.3,43.27 36.42,43.4 v1(36.42,43.94)
USART8_TX_GOPORT3: length 63.9
  TOP w0.18: U4.98 32.53,35.11 32.99,35.56 v1(32.99,36.06) ; J12.4 74.48,44.52 74.16,44.84 74.16,47.3 73.25,48.21 72.95,48.21 59.01,48.21 55.02,44.22 41.42,44.22 41.05,44.59 39.41,44.59 39.05,44.23 38,44.23 37.21,44.23 36.96,44.49 36.08,44.49 35.73,44.14 35.73,43.69 35,42.95 v1(33.78,42.95) ; v1(34.35,38.9) 37.55,38.9 38.6,39.95 39.5,39.95 R1.5
  BOTTOM w0.18: v1(32.99,36.06) 32.99,36.49 34.35,37.85 v1(34.35,38.9) 34.35,40.07 34.7,40.42 34.7,41.17 33.78,42.09 v1(33.78,42.95)
USB5V: length 4.4
  TOP w0.3: 6.65,28.32 6.75,28.23 D4.5
  TOP w0.4: J5.1 5.57,27.97 5.92,28.32 6.65,28.32 F1.1
USB5V_F: length 69.9
  TOP w0.18: v1(46.7,29.08) U4.68 ; 7.9,32.4 7.9,29.02 9.38,27.54 15.28,27.54 17,25.82 20.71,25.82 21.18,26.29 21.18,35.28 22.61,36.71 22.82,36.92 25.92,36.92 27.42,38.42 33.46,38.42 34.61,37.27 43.42,37.27 43.64,37.49 v1(44.24,37.49)
  TOP w0.8: F1.2 7.9,32.4 8.5,33 10.75,33 11.5,32.25 Q3.3
  BOTTOM w0.18: v1(46.7,29.08) 46.7,34.91 44.63,36.98 44.63,37.1 v1(44.24,37.49)
USB_D+: length 67.3
  TOP w0.18: R9.2 49.67,30.68 49.82,30.53 50.02,30.53 50.95,31.45 50.95,35.3 49.7,36.55 34.91,36.55 34.31,36.55 33.16,37.7 27.72,37.7 26.22,36.2 23.12,36.2 21.9,34.98 21.9,25.99 21.01,25.1 20.71,25.1 16.7,25.1 16.49,25.31 14.98,26.82 9.2,26.82 9.05,26.67 9.05,26.2 8.95,26.1 8.65,26.1 8.55,26.2 8.55,26.65 8.38,26.82 6.25,26.82 ; J5.3 5.12,26.67 5.27,26.82 6.25,26.82 ; 6.25,26.82 D4.1
USB_D-: length 67.4
  TOP w0.18: D4.6 6.25,27.18 ; 6.25,27.18 5.27,27.18 5.13,27.32 J5.2 ; 6.25,27.18 15.13,27.18 16.85,25.46 20.86,25.46 21.54,26.14 21.54,35.13 22.97,36.56 26.07,36.56 27.57,38.06 33.31,38.06 34.46,36.91 34.76,36.91 49.55,36.91 49.55,36.91 49.85,36.91 51.31,35.45 51.31,31.3 50.17,30.17 49.82,30.17 49.67,30.02 48.6,30.02
VCAP_1: length 2.7
  TOP w0.3: U4.49 43.03,17.57 43.5,17.11 C17.1
VCAP_2: length 4.7
  TOP w0.3: C16.1 49,32.17 48.41,31.58 U4.73
N62667: length 6.3
  TOP w0.2: R6.2 19.22,33.73 19.22,32.53 18.59,31.9 ; 18.59,31.9 18.59,30.07 17.95,29.43 R4.1 ; 18.59,31.9 U3.1
N62753: length 14.3
  TOP w0.18: 22.5,17.9 Q2.2 ; 22.5,17.9 22.05,17.9 21.85,17.7 Q2.3 ; 22.5,17.9 22.84,18.25 28.02,18.25 28.17,18.39 28.62,18.39 28.94,18.07 28.94,17.81 29.35,17.4 29.35,14.85 29.2,14.7 R5.8
N62779: length 2.9
  TOP w0.5: L1.1 26.18,41.9 U1.5
N62801: length 22.2
  TOP w0.2: R1.1 41.5,41.55 43.95,41.55 44.6,42.2 61.4,42.2 61.76,42.56 D2.C
N62841: length 12.4
  TOP w0.18: U4.37 37.03,18.13 37,18.1 v1(37,17.7) ; v1(28.4,17.84) 27.67,17.84 27.36,17.53 27.36,17.48 27.1,17.23 R5.3
  BOTTOM w0.18: v1(28.4,17.84) 29.28,17.84 29.42,17.7 29.88,17.7 30.02,17.84 36.31,17.84 36.45,17.7 v1(37,17.7)
N63081: length 8.4
  TOP w0.3: 28.7,22.08 28.53,22.08 28,21.55 C5.1 ; 28.7,22.08 U4.22 ; 28.7,22.08 28.7,22.37 28.91,22.58 U4.21
  TOP w0.6: C5.1 26.35,20.8 C44.1 L2.1
N74908: length 44.7
  TOP w0.18: R1.8 41.3,39.35 v1(41.7,38.95) ; Q1.6 20.25,23.4 22.26,25.41 22.26,34.83 23.27,35.84 26.91,35.84 29.41,33.34 30.56,33.34 31.01,32.89 32.21,32.89 34.42,30.68 34.52,30.68 36.09,29.1 37.01,29.1 37.02,29.11 v1(37.56,29.11)
  BOTTOM w0.18: v1(41.7,38.95) 40.8,38.05 40.8,35.47 40.01,34.68 37.34,32.01 37.34,29.88 37.56,29.66 v1(37.56,29.11)
N77511: length 10.1
  TOP w0.18: D1.C 12.1,20 17.4,14.7 R3.1
N77515: length 9.1
  TOP w0.18: R3.2 17.2,16.3 15.75,17.75 15.75,21.35 16.5,22.1 Q1.3
N197515: length 7.4
  TOP w0.18: v1(51.25,24.9) 50.7,24.35 R15.8 ; v1(54.17,23.91) 55.21,23.91 55.35,23.77 Q10.6
  BOTTOM w0.18: v1(51.25,24.9) 52.6,24.9 53.59,23.91 v1(54.17,23.91)
N197535: length 40.2
  TOP w0.18: R15.1 50.7,21.09 50.3,20.69 50.3,18 50.74,17.56 51.07,17.56 51.13,17.5 51.92,17.5 51.93,17.51 57.05,17.51 57.07,17.49 61.82,17.49 64.3,15.01 64.3,13 v1(62.75,11.45) ; v1(71.55,2.55) D5.C
  BOTTOM w0.18: v1(62.75,11.45) 62.75,10.91 62.75,10.9 62.75,6.6 66.2,3.15 70.95,3.15 v1(71.55,2.55)
N197921: length 16.7
  TOP w0.18: Q11.3 56.65,28.15 57.17,28.67 57.17,31.73 56.9,32 55.25,32 53.59,30.34 53.59,29.33 53.4,29.14 53.4,26.27 51.25,24.12 R15.7
N197949: length 25.5
  TOP w0.18: R15.2 51.25,20.5 51.51,20.25 52.73,20.25 52.77,20.3 53.29,20.3 54.13,19.45 58.89,19.45 59.06,19.29 59.95,19.29 60.38,19.72 v1(62.66,19.72)
  TOP w0.25: D6.C v1(73.2,18.2)
  BOTTOM w0.18: v1(73.2,18.2) 71.57,19.83 69.29,19.83 69.18,19.72 v1(62.66,19.72)
N198166: length 9.1
  TOP w0.18: Q11.6 54.45,29.95 53.95,29.45 53.95,29.18 53.76,28.99 53.76,26.12 51.75,24.11 R15.6
N198194: length 43.3
  TOP w0.18: R15.3 51.75,20.98 52.08,20.66 53.3,20.66 53.88,21.23 53.88,21.66 54.2,21.98 54.2,23.11 53.62,23.68 53.62,24.59 54.17,25.14 56.08,25.14 57.27,23.95 57.74,23.95 58.1,24.31 58.1,25.3 57.53,25.87 57.53,31.88 57.09,32.32 57.09,35.89 59.85,38.65 v1(67.65,38.65)
  TOP w0.25: D7.C 73.2,36.8 v1(72.6,37.4)
  BOTTOM w0.18: v1(67.65,38.65) 71.35,38.65 v1(72.6,37.4)
